# Altium PCB pcb v1.PcbDoc
Units mm, origin at the board's own origin, x right, y up, seen from the top; angles counter-clockwise.
Board outline 40 x 60 mm, 2 copper layers (Top Layer, Bottom Layer), stack 1.671 mm thick; 3 components, 4 nets, 38 pads, 0 vias.
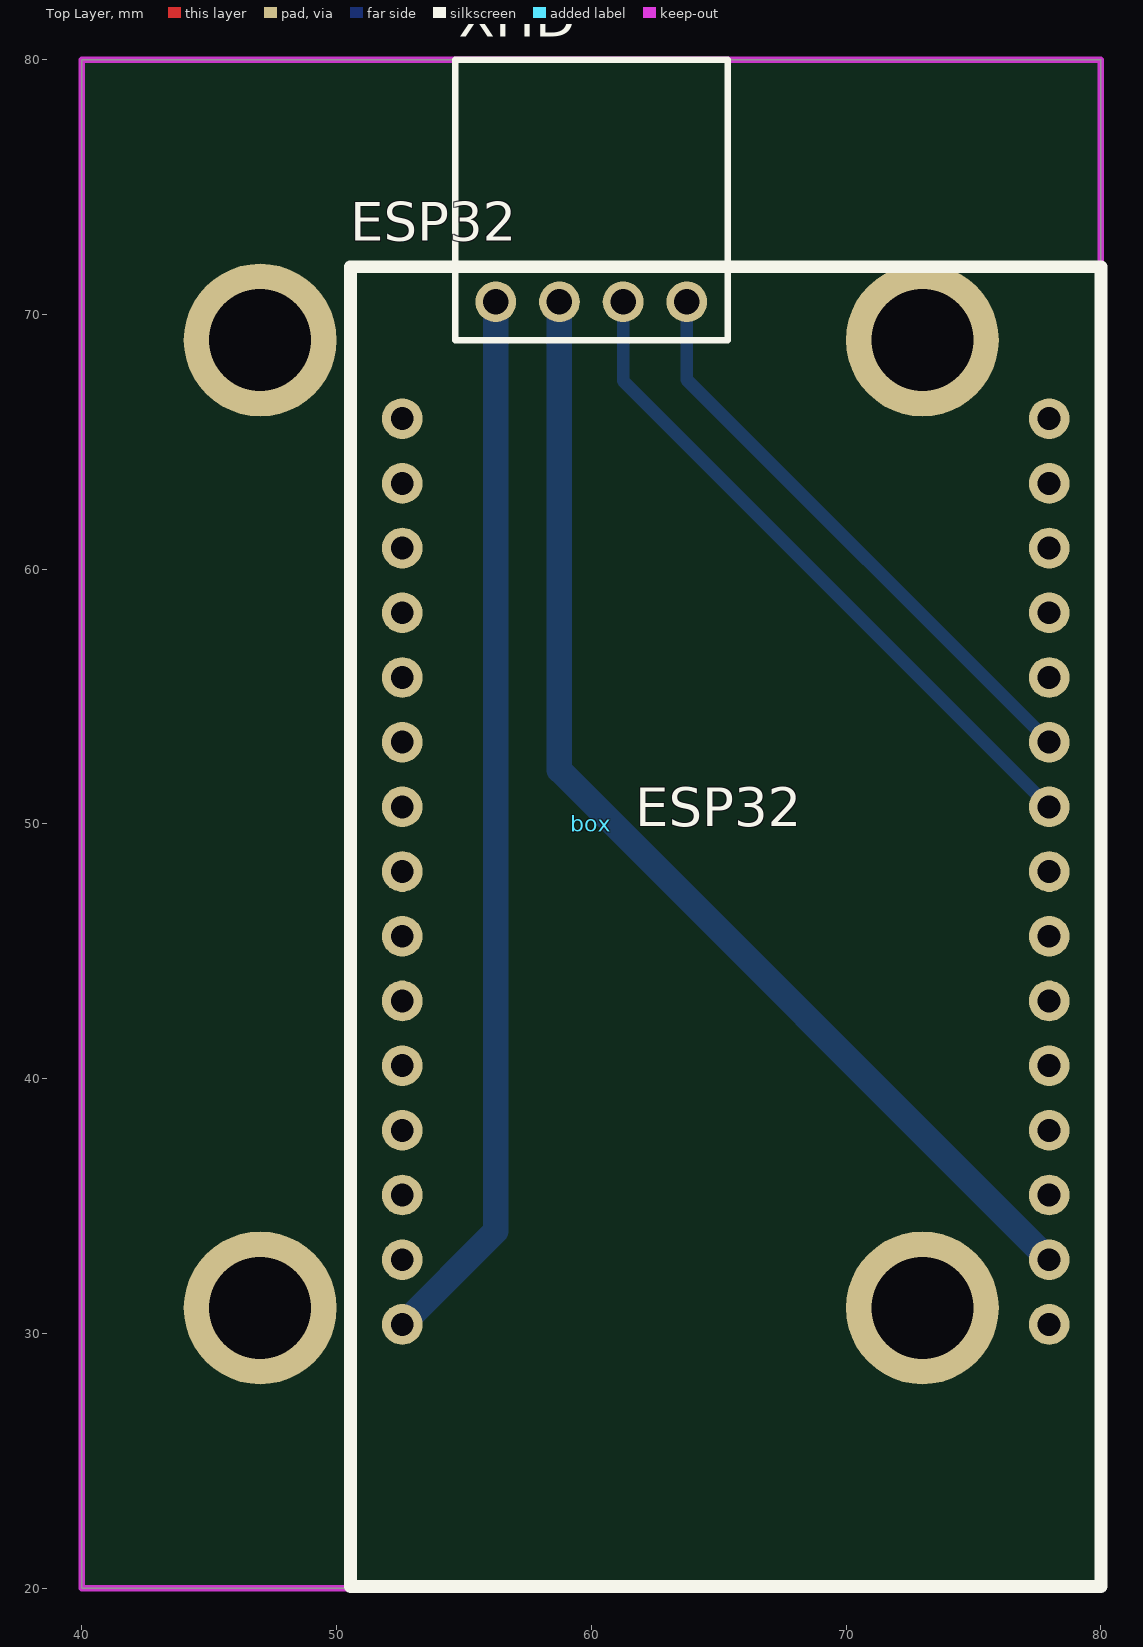
[diagram p0: Top Layer view]
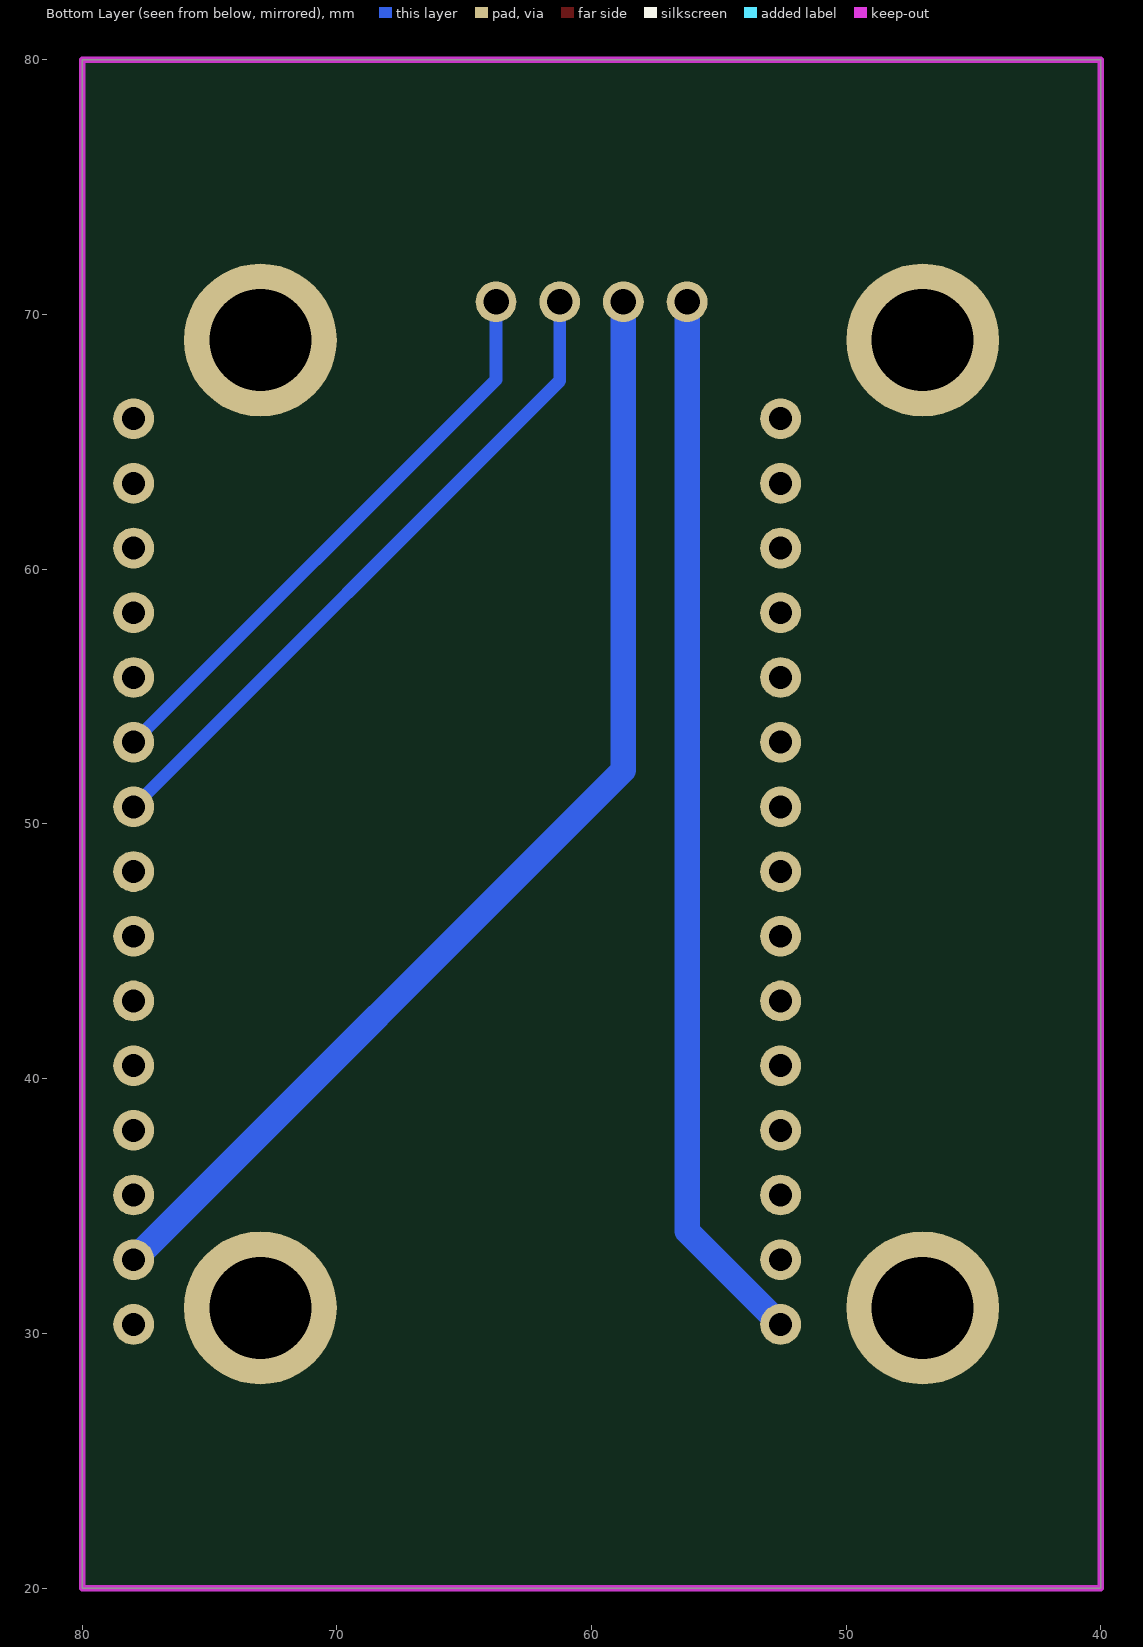
[diagram p1: Bottom Layer view, seen from below]

## Layer stack, top to bottom
Top Solder: solder mask 0.0102, Solder Resist, Dk 3.5
Top Layer: signal copper 0.0356
Dielectric 1: dielectric 1.6, FR-4, Dk 4.8
Bottom Layer: signal copper 0.0356
Bottom Solder: solder mask 0.0102, Solder Resist, Dk 3.5

## Board outline
40,20 40,80 80,80 80,20

## Design rules (kind name [scope] priority, off if disabled: settings)
AssemblyTestPointUsage [All] p1 off:
AssemblyTestpoint [All] p1 off: testpointundercomponent=TRUE minsize=1.016 maxsize=2.54 preferedsize=1.524 minholesize=0 maxholesize=1.016 preferedholesize=0.813 testpointgrid=0.025 usegrid=TRUE gridtolerance=0 allowsidetop=TRUE allowsidebottom=TRUE
Clearance [All] p1: gap=0.5 ignorepadtopadclearanceinfootprint=FALSE
ComponentClearance [All] p1: gap=0.254 collisioncheckmode=3 verticalgap=1 showdistances=FALSE
FabricationTestPointUsage [All] p1 off: valid=0 allowmultiple=FALSE
FabricationTestpoint [All] p1 off: side=3 testpointundercomponent=TRUE minsize=1.016 maxsize=2.54 preferedsize=1.524 minholesize=0 maxholesize=1.016 preferedholesize=0.813 testpointgrid=0.025 allowsidetop=TRUE allowsidebottom=TRUE usegrid=TRUE gridtolerance=0
Height [All] p1 off: minheight=0 maxheight=25.4 prefheight=12.7
HoleSize [All] p1: absolutevalues=TRUE maxlimit=5 minlimit=0.5 maxpercent=80.000 minpercent=20.000
HoleToHoleClearance [All] p1: gap=0.5 allowstackedmicrovias=TRUE
MinimumSolderMaskSliver [All] p1 off: minsoldermaskwidth=0.254
PasteMaskExpansion [All] p1 off: expansion=0
PlaneClearance [All] p1 off: clearance=0.508
PlaneConnect [All] p1 off: planeconnectstyle=Relief reliefexpansion=0.508 reliefentries=4 reliefconductorwidth=0.254 reliefairgap=0.254
PolygonConnect [All] p1 off: connectstyle=Relief reliefconductorwidth=0.254 reliefentries=4 polygonreliefangle="90 Angle" airgapwidth=0.254
RoutingLayers [All] p1: top layer_v5=FALSE bottom layer_v5=TRUE
RoutingVias [All] p1: holewidth=0.711 width=1.27 viastyle="Through Hole" minholewidth=0.711 minwidth=1.27 maxholewidth=0.711 maxwidth=1.27
ShortCircuit [All] p1 off: allowed=FALSE
SilkToSilkClearance [All] p1 off: silktosilkclearance=0.254
SilkToSolderMaskClearance [IsPad] p1 off: minsilkscreentomaskgap=0.254 clearancetoexposedcopper=TRUE
SolderMaskExpansion [All] p1 off: expansion=0.102 istentingtop=FALSE
SupplyNets "Schematic Supply Nets_1" [InNet('GND')] p1: voltage=0.000
SupplyNets "Schematic Supply Nets" [InNet('+5')] p2: voltage=0.000
UnRoutedNet [All] p1 off:
UnpouredPolygon [All] p1 off:
Width [All] p1: maxlimit=1 minlimit=0.5 preferedwidth=0.5
12 further rules are at their usual default settings.

## Components (designator, comment, footprint, x,y, rotation, side; value= is the part's Value field where it differs from the comment)
box "box" BOX 60,50 r180 top
ESP32 "ESP32 WROOM NODEMCU V2" ESP32 65.278,50.673 r0 top
XHD "simple desighn" PORT 60,74.5 r0 top

## Footprints (in the part's own frame and the unit in brackets; to place one, negate y for a bottom-side part, rotate by r counter-clockwise, add the part's x,y. Pads: shape width x height; smd on the part's side, far side on the other; paste and mask are expansions set on the pad)
BOX [mm]
  round 6 hole 4: 1(-13,19) 2(13,19) 5(13,-19) 6(-13,-19)
  Keep-Out Layer lines w0.254: 20,30 20,-30 -20,-30 -20,30 20,30
  body extent -55.6,-35.65 55.6,35.65, height 7.4
ESP32 [mm]
  round 1.6 hole 0.9: 1(-12.7,15.24) 2(-12.7,12.7) 3(-12.7,10.16) 4(-12.7,7.62) 5(-12.7,5.08) 6(-12.7,2.54) 7(-12.7,0) 8(-12.7,-2.54) 9(-12.7,-5.08) 10(-12.7,-7.62) 11(-12.7,-10.16) 12(-12.7,-12.7) 13(-12.7,-15.24) 14(-12.7,-17.78) 15(-12.7,-20.32) 16(12.7,-20.32) 17(12.7,-17.78) 18(12.7,-15.24) 19(12.7,-12.7) 20(12.7,-10.16) 21(12.7,-7.62) 22(12.7,-5.08) 23(12.7,-2.54) 24(12.7,0) 25(12.7,2.54) 26(12.7,5.08) 27(12.7,7.62) 28(12.7,10.16) 29(12.7,12.7) 30(12.7,15.24)
  silkscreen extent -14.73,-30.61 14.73,21.21, body extent -14.3,-30.24 14.2,20.69, height 15.3
PORT [mm]
  round 1.6 hole 1: 1(-3.75,-4) 2(-1.25,-4) 3(1.25,-4) 4(3.75,-4)
  silkscreen extent -5.35,-5.5 5.35,5.5, body extent -5.35,-5.5 5.35,5.5, height 5.9

## Part data
XHD: library part XHD

## Nets (pads, with @x,y where several pads share a name; then routed paths per layer and width w, separated by ;. In a path a pad name is that pad's centre, name@x,y a point inside that pad or via, vN(x,y) a via of type N, cw(c..) or ccw(c..) an arc to the next point about the centre after c; other vN are vias at no path point)
+5: ESP32.15 XHD.1 | length 41.8
  Bottom Layer w1: ESP32.15 52.584,30.353 56.25,34.019 XHD.1 XHD.1@56.365,70.385
GND: ESP32.17 XHD.2 | length 45.5
  Bottom Layer w1: XHD.2@58.75,70.454 58.75,52.115 77.972,32.893 ESP32.17
SCL: ESP32.24 XHD.3 | length 26.8
  Bottom Layer w0.5: XHD.3 61.25,67.401 ESP32.24
SDA: ESP32.25 XHD.4 | length 23.2
  Bottom Layer w0.5: XHD.4 63.75,67.441 ESP32.25
pads on no net: box.1 box.2 box.5 box.6 ESP32.1 ESP32.2 ESP32.3 ESP32.4 ESP32.5 ESP32.6 ESP32.7 ESP32.8 ESP32.9 ESP32.10 ESP32.11 ESP32.12 ESP32.13 ESP32.14 ESP32.16 ESP32.18 ESP32.19 ESP32.20 ESP32.21 ESP32.22 ESP32.23 ESP32.26 ESP32.27 ESP32.28 ESP32.29 ESP32.30